# Altium PCB JHZ-E01S-HW-Sensor-X1-S0.1-磁编码器AS5600-20160919.PcbDoc
Units mil, origin at the board's own origin, x right, y up, seen from the top; angles counter-clockwise.
Board outline 787.4 x 787.4 mil, 2 copper layers (Top Layer, Bottom Layer); 7 components, 6 nets, 23 pads, 18 vias.
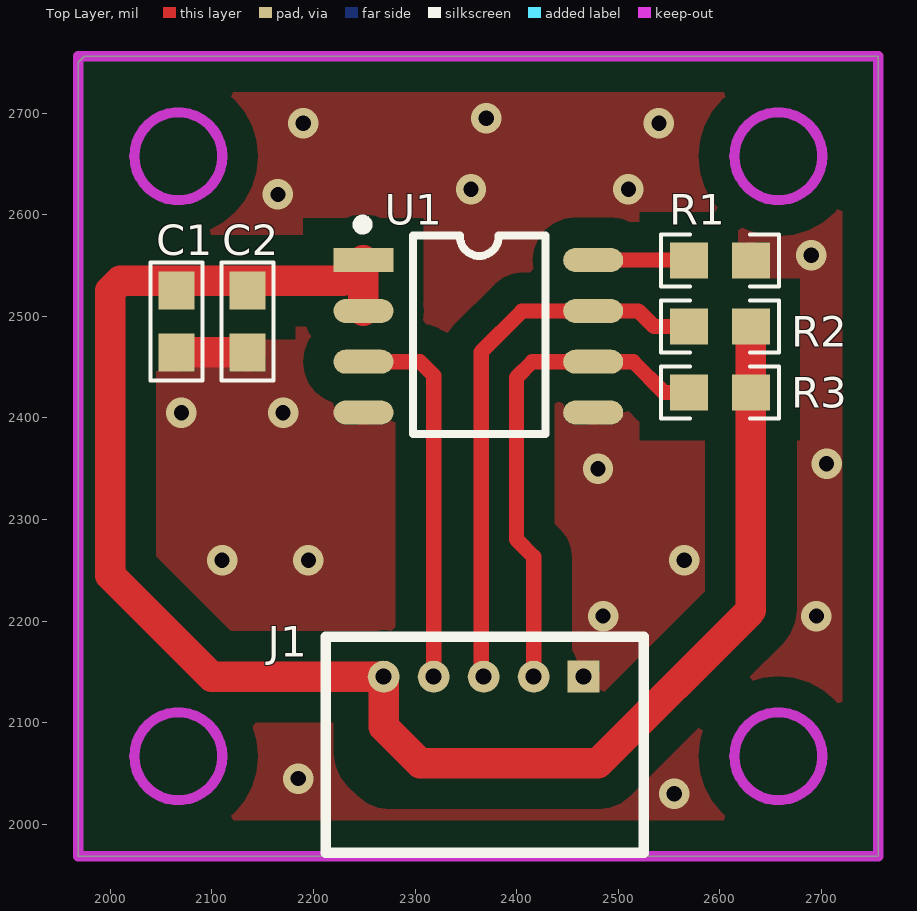
[diagram p0: Top Layer view]
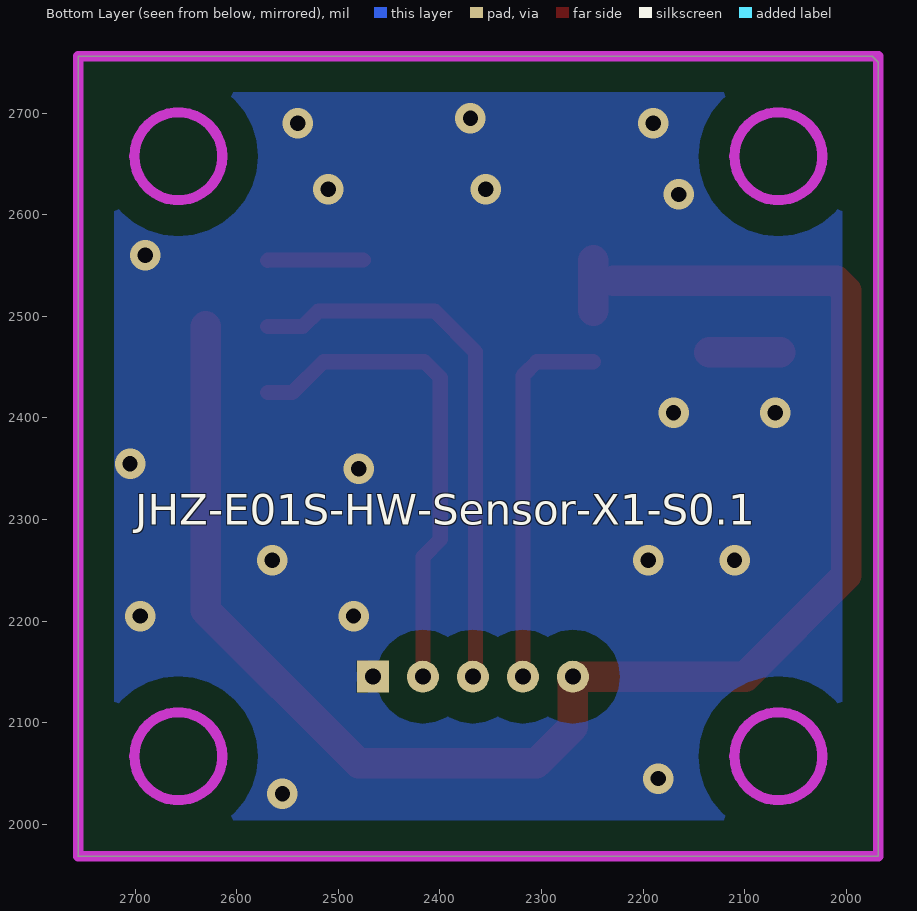
[diagram p1: Bottom Layer view, seen from below]

## Layer stack, top to bottom
Top Layer: signal copper 1.4
Dielectric: dielectric 12.6, FR-4, Dk 4.8
Bottom Layer: signal copper 1.4

## Board outline
1968.5,1968.5 2755.91,1968.5 2755.91,2755.91 1974.41,2755.91 1968.5,2750

## Design rules (kind name [scope] priority, off if disabled: settings)
Clearance [All] p1: gap=10
MinimumSolderMaskSliver [All] p1: minsoldermaskwidth=1
PolygonConnect [IsVia] p1: connectstyle=Direct reliefconductorwidth=10 reliefentries=4 polygonreliefangle="90 Angle" airgapwidth=10
RoutingVias [All] p1: holewidth=28 width=50 viastyle="Through Hole" minholewidth=10 minwidth=30 maxholewidth=28 maxwidth=50
SilkToSilkClearance [All] p1: silktosilkclearance=1
SilkToSolderMaskClearance [IsPad] p1: minsilkscreentomaskgap=1 clearancetoexposedcopper=TRUE
SolderMaskExpansion [All] p1: expansion=4
Width [All] p1: maxlimit=100 minlimit=10 preferedwidth=10 minimp=50.000000 maximp=50.000000 favimp=50.000000
25 further rules are at their usual default settings.

## Components (designator, comment, footprint, x,y, rotation, side; value= is the part's Value field where it differs from the comment)
C1 "MCC0603" C0603_M1608 2065,2495 r270 top
C2 "MCC0603" C0603_M1608 2135,2495 r270 top
J1 "AT-1.25-AW-5P" AT-1.25-AW-5P 2525,2165 r180 top
R1 "R0603_M1608" R0603_M1608 2600,2555 r0 top
R2 "R0603_M1608" R0603_M1608 2600,2490 r180 top
R3 "R0603_M1608" R0603_M1608 2600,2425 r180 top
U1 "SOIC-8" SOIC-8 2362.2,2480.32 r0 top locked

## Footprints (in the part's own frame and the unit in brackets; to place one, negate y for a bottom-side part, rotate by r counter-clockwise, add the part's x,y. Pads: shape width x height; smd on the part's side, far side on the other; paste and mask are expansions set on the pad)
AT-1.25-AW-5P [mm]
  rect 0.8x0.8 hole 0.4: 1(1.5,0.5)
  round 0.8 hole 0.4: 2(2.75,0.5) 3(4,0.5) 4(5.25,0.5) 5(6.5,0.5)
  silkscreen extent 0,-0.5 7.95,4.9
C0603_M1608 [mm] "Chip Capacitor, 2-Leads, Body 1.6x0.8mm, IPC Medium Density"
  rect 0.95x0.9 smd: 1(-0.775,0) 2(0.775,0)
  silkscreen extent -1.48,-0.65 1.48,0.65
R0603_M1608 [mm]
  rect 0.95x0.9 smd: 1(-0.775,0) 2(0.775,0)
  silkscreen extent -1.48,-0.65 1.48,0.65
SOIC-8 [mm]
  rect 1.5x0.6 smd: 1(-2.872,1.905)
  oval 1.5x0.6 smd: 2(-2.872,0.635) 3(-2.872,-0.635) 4(-2.872,-1.905) 5(2.872,-1.905) 6(2.872,-0.635) 7(2.872,0.635) 8(2.872,1.905)
  silkscreen extent -3.02,-2.44 1.68,2.92

## Part data
C1 C2: "Multilayer Ceramic Capacitor 0603"
J1: library part 1.25T-1-A-5P, "Header, 1.25mm,5-Pin"
R1 R2 R3: "Resistor"
U1: library part AS5600

## Via types
v1: diameter 30, hole 15, Top Layer to Bottom Layer, 18 vias

## Nets (pads, with @x,y where several pads share a name; then routed paths per layer and width w, separated by ;. In a path a pad name is that pad's centre, name@x,y a point inside that pad or via, vN(x,y) a via of type N, cw(c..) or ccw(c..) an arc to the next point about the centre after c; other vN are vias at no path point)
3.3V: C1.1 C2.1 J1.5 R2.1 R3.1 U1.1 U1.2 | length 1636.8
  Top Layer w30: 2228.83,2535 2010,2535 2000,2525 2000,2245 2099.68,2145.32 J1.5@2265,2145.32 ; U1.2 U1.1 ; J1.5 2269.09,2095.91 2305,2060 2480,2060 2630.51,2210.51 R3.1 R2.1
GND: C1.2 C2.2 J1.1 R1.2 U1.4 U1.5 | length 70
  Top Layer w30: C1.2 C2.2
  other v1: 2555,2030 2185,2045 2485,2205 2695,2205 2110,2260 2195,2260 2565,2260 2480,2350 2705,2355 2070,2405 2170,2405 2690,2560 2165,2620 2355,2625 2510,2625 2190,2690 2540,2690 2370,2695
NetR1_1: R1.1 U1.8 | length 94.4
  Top Layer w15: U1.8 2569.17,2555.32 R1.1
OUT: J1.4 U1.3 | length 371.2
  Top Layer w15: U1.3 2304.68,2455.32 2318.31,2441.69 J1.4
SCL: J1.3 R2.2 U1.7 | length 548.3
  Top Layer w15: J1.3 2365,2147.83 2365,2465 2405,2505 2405.32,2505.32 U1.7 2519.68,2505.32 2535,2490 R2.2
SDA: J1.2 R3.2 U1.6 | length 490.3
  Top Layer w15: J1.2 2416.73,2263.27 2399.68,2280.32 2399.68,2439.68 2415.32,2455.32 U1.6 2514.68,2455.32 2545,2425 R3.2

## Polygon pours and split planes (outlines as drawn)
GND on Bottom Layer "Top Layer-No Net 1" (solid, pour order 6): 1968.5,2755.91 2755.91,2755.91 2755.91,1968.5 1968.5,1968.5
GND on Top Layer "Top Layer-No Net 1" (solid, pour order 9): 1968.5,1968.5 2755.91,1968.5 2755.91,2755.91 1968.5,2755.91

## Keep-outs
Keep-Out Layer:
  circle w10: c2657.48,2657.48 r43.31
  circle w10: c2657.48,2066.93 r43.31
  circle w10: c2066.93,2066.93 r43.31
  circle w10: c2066.93,2657.48 r43.31
  lines w10: 1968.5,1968.5 2755.91,1968.5 2755.91,2755.91 1968.5,2755.91 1968.5,1968.5

## Silkscreen, mask and mechanical layers (free items; w line width, h text height)
Bottom Overlay:
  text "JHZ-E01S-HW-Sensor-X1-S0.1" at 2700,2295 h30